# EAGLE board Trinket_Charger_Shield_B_051016 (EAGLE 7.5.0)
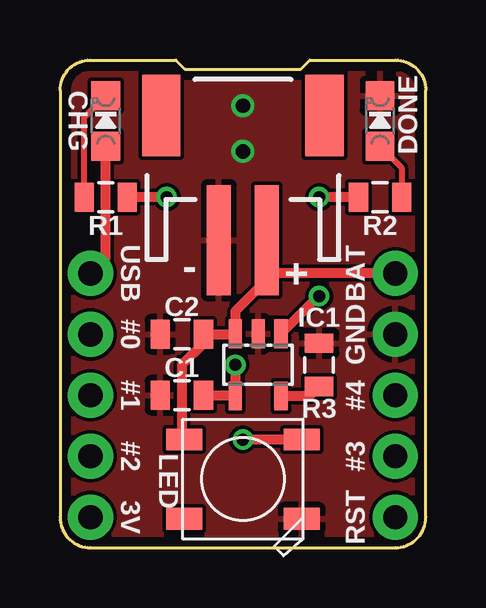
[diagram p0: board, top side]
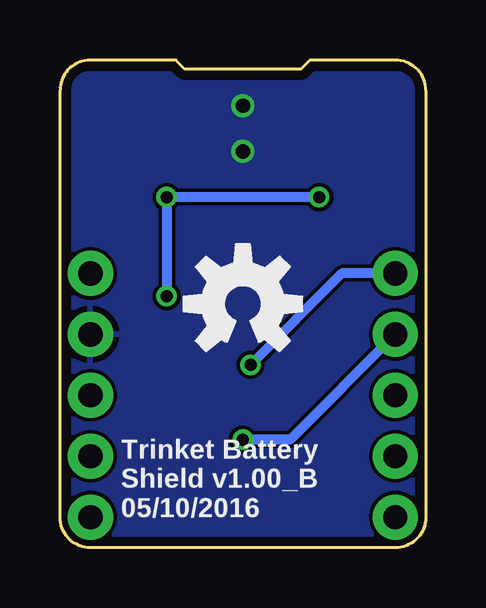
[diagram p1: board, bottom side, seen from below]

Size 15.24 x 20.32 mm. Coordinates in mm from the lower left corner, seen from the top.
Outline: 1.27,0 13.97,0 arc90 15.24,1.27 15.24,19.05 arc90 13.97,20.32 10.41,20.32 10.03,19.94 5.21,19.94 4.83,20.32 1.27,20.32 arc90 0,19.05 0,1.27 arc90 1.27,0
Copper layers (1*16): Top 0.0356mm / dielectric 1.5011mm / Bottom 0.0356mm
Design rules "oshpark-2layer": minimum track width 6mil, minimum drill 13mil, track to track 6mil, track to pad 6mil, pad to pad 6mil, via to via 6mil, smd to smd 6mil, copper to edge 15mil, drill to drill 6mil, minimum pad ring 7mil, minimum via ring 7mil, stop-mask expansion 2.5mil, vias tented up to drill 0mil, thermal gap 10mil

## Footprints (pad centres in the part's own frame; a part is rotated, then mirrored left to right if it is on the bottom)
0805 = smd 0.8 x 1.2: 1 -0.9,0; 2 0.9,0
CHIPLED_0805_NOOUTLINE = smd 1.2 x 1.2: A 0,-1.05; C 0,1.05
SOT23-5L = smd 0.55 x 1.2: 1 -0.95,-1.3; 2 0,-1.3; 3 0.95,-1.3; 4 0.95,1.3; 5 -0.95,1.3
JST-2-SMD = smd 1 x 4.6: 1 -1,-3.7; 2 1,-3.7 | smd 1.6 x 3.4: NC1 -3.4,1.5; NC2 3.4,1.5
1X05_NO_SILK = drill 1.016 pad 1.88: 1 0,0; 2 2.54,0; 3 5.08,0; 4 7.62,0; 5 10.16,0
WS2812B = smd 1.5 x 0.9: 1-VDD 2.45,-1.65; 2-DOUT 2.45,1.65; 3-GND -2.45,1.65; 4-DIN -2.45,-1.65

## Placement (x,y rotation side)
C1  10uF  [0805]  5.08,6.35 180 top
C2  10uF  [0805]  5.08,8.89 180 top
D1  CHG  [CHIPLED_0805_NOOUTLINE]  1.91,17.78 0 top
D2  DONE  [CHIPLED_0805_NOOUTLINE]  13.34,17.78 0 top
IC1  MCP73831/OT  [SOT23-5L]  8.26,7.62 180 top
J1  [JST-2-SMD]  7.62,16.51 0 top
J2  [1X05_NO_SILK]  13.97,11.43 270 top
J3  [1X05_NO_SILK]  1.27,11.43 270 top
LED  WS2812B5050  [WS2812B]  7.62,2.86 180 top
R1  1K  [0805]  1.91,14.61 180 top
R2  1K  [0805]  13.34,14.61 0 top
R3  10K  [0805]  10.79,7.62 270 top
U$1  [OSHW-LOGO-M]  7.62,10.16 0 bottom

## Library data of the parts
C1 C2 R1-R3 = SparkFun-Passives
D1 D2 = microbuilder
IC1 LED = adafruit
J1 = SparkFun-Connectors; BTM_NEG: -; BTM_POS: +; PROD_ID: CONN-11443; TOP_NEG: -; TOP_POS: +
J2 J3 = SparkFun-Connectors
U$1 = SparkFun-Aesthetics

## Nets
3V3: J3.5
D0: J3.2 LED.4-DIN
D1: J3.3
D2: J3.4
D3: J2.4
D4: J2.3
GND: C1.2 C2.2 D2.C IC1.2 J1.1 J2.2 LED.3-GND R3.1
N$3: IC1.5 R3.2
N$6: IC1.1 R1.1 R2.1
N$7: D1.C R1.2
N$8: D2.A R2.2
RST: J2.5
V_BATT: C2.1 IC1.3 J1.2 J2.1 LED.1-VDD
V_USB: C1.1 D1.A IC1.4 J3.1

## Tracks (layer width: path | path; a pad name or v marks a point on that pad's centre or on a via)
D0  (via drill 0.5)
  Top 0.406: LED.4-DIN v7.62,4.51
  Bottom 0.406: J3.2 5.65,4.51 v7.62,4.51
GND  (via drill 0.6)
  other vias: 7.62,16.51 7.62,18.41
  pour Top: 0,20.32 15.24,20.32 15.24,0 0,0
  pour Bottom: 0,0 15.24,0 15.24,20.32 0,20.32
N$3
  Top 0.406: R3.2 10.39,6.32 IC1.5
N$6  (via drill 0.5)
  Top 0.406: v4.45,14.61 R1.1 | R2.1 v10.79,14.61 | IC1.1 10.76,10.48 v10.79,10.48
  Bottom 0.406: v4.45,14.61 v10.79,14.61 v10.79,10.48
N$7
  Top 0.254: R1.2 1,17.93 D1.C
N$8
  Top 0.254: D2.A 14.23,15.83 R2.2
V_BATT
  Top 0.254: 7.28,8.89 IC1.3 | C2.1 5.98,9.26
  Top 0.406: J1.2 8.62,11.43 | 8.62,11.43 8.62,11.16 7.3,9.85 IC1.3 | 7.28,8.89 C2.1 5.98,8.52 5.08,7.62 5.08,4.6 LED.1-VDD | J2.1 8.62,11.43
V_USB  (via drill 0.5)
  Top 0.406: v7.3,7.62 7.3,6.67 IC1.4 arc90 7.28,6.35 C1.1 | D1.A 1.91,12.06 J3.1
  Bottom 0.406: v7.3,7.62 3.49,11.43 J3.1

## Text on the board
tPlace: - | +
bPlace: Trinket Battery / Shield v1.00_B / 05/10/2016
tNames: USB | BAT | #0 | GND | #1 | #4 | #2 | #3 | 3V | RST